# Altium PCB 水杯.PcbDoc
Units mm, origin at the board's own origin, x right, y up, seen from the top; angles counter-clockwise.
Board outline 66.4 x 64.2 mm, 2 copper layers (Top Layer, Bottom Layer), stack 1.671 mm thick; 122 components, 0 nets, 336 pads, 0 vias.
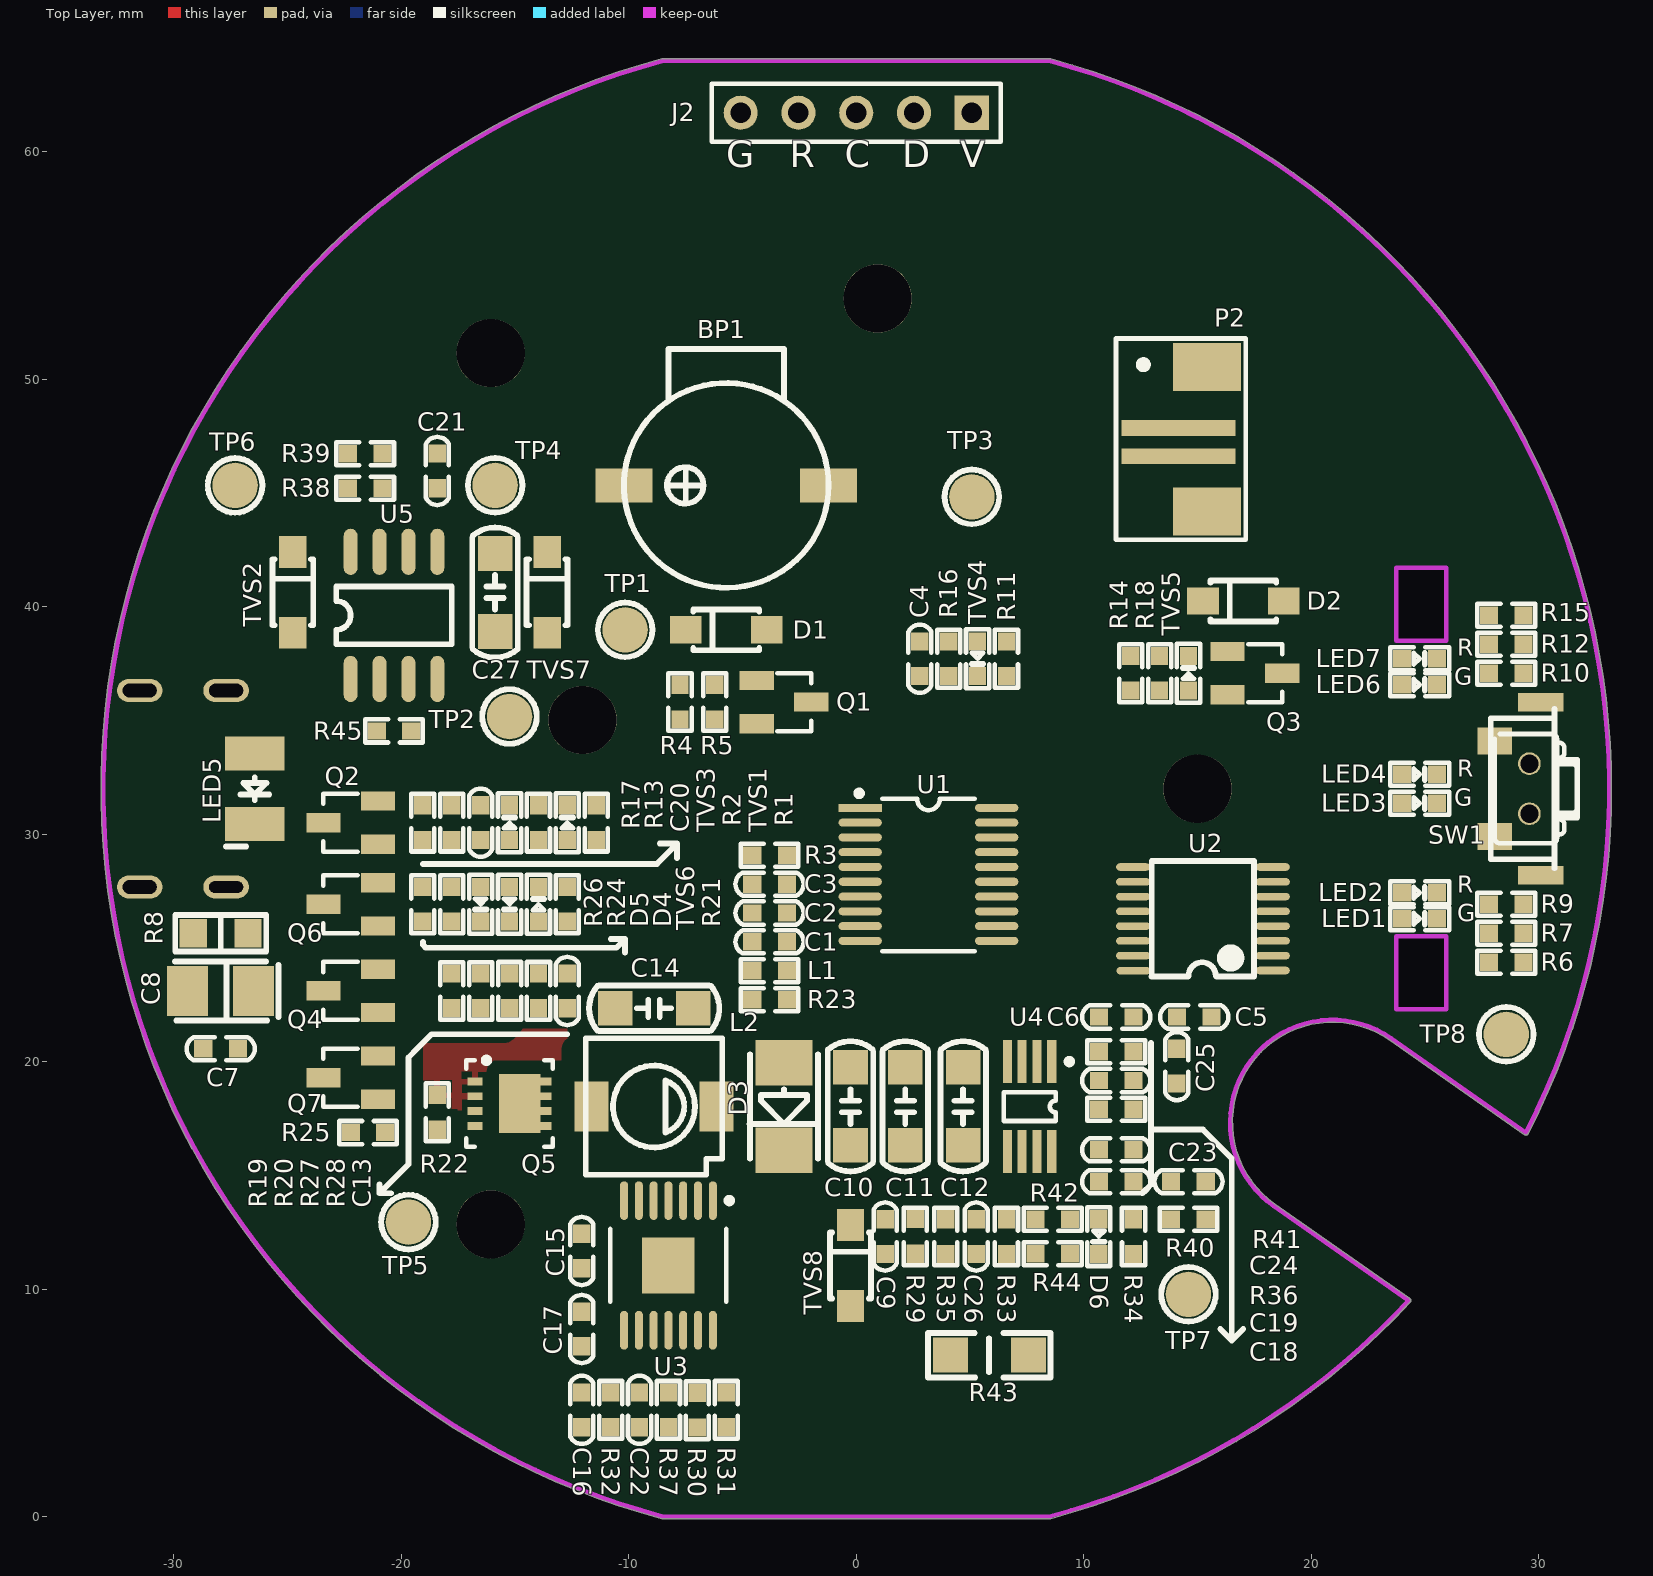
[diagram p0: Top Layer view]
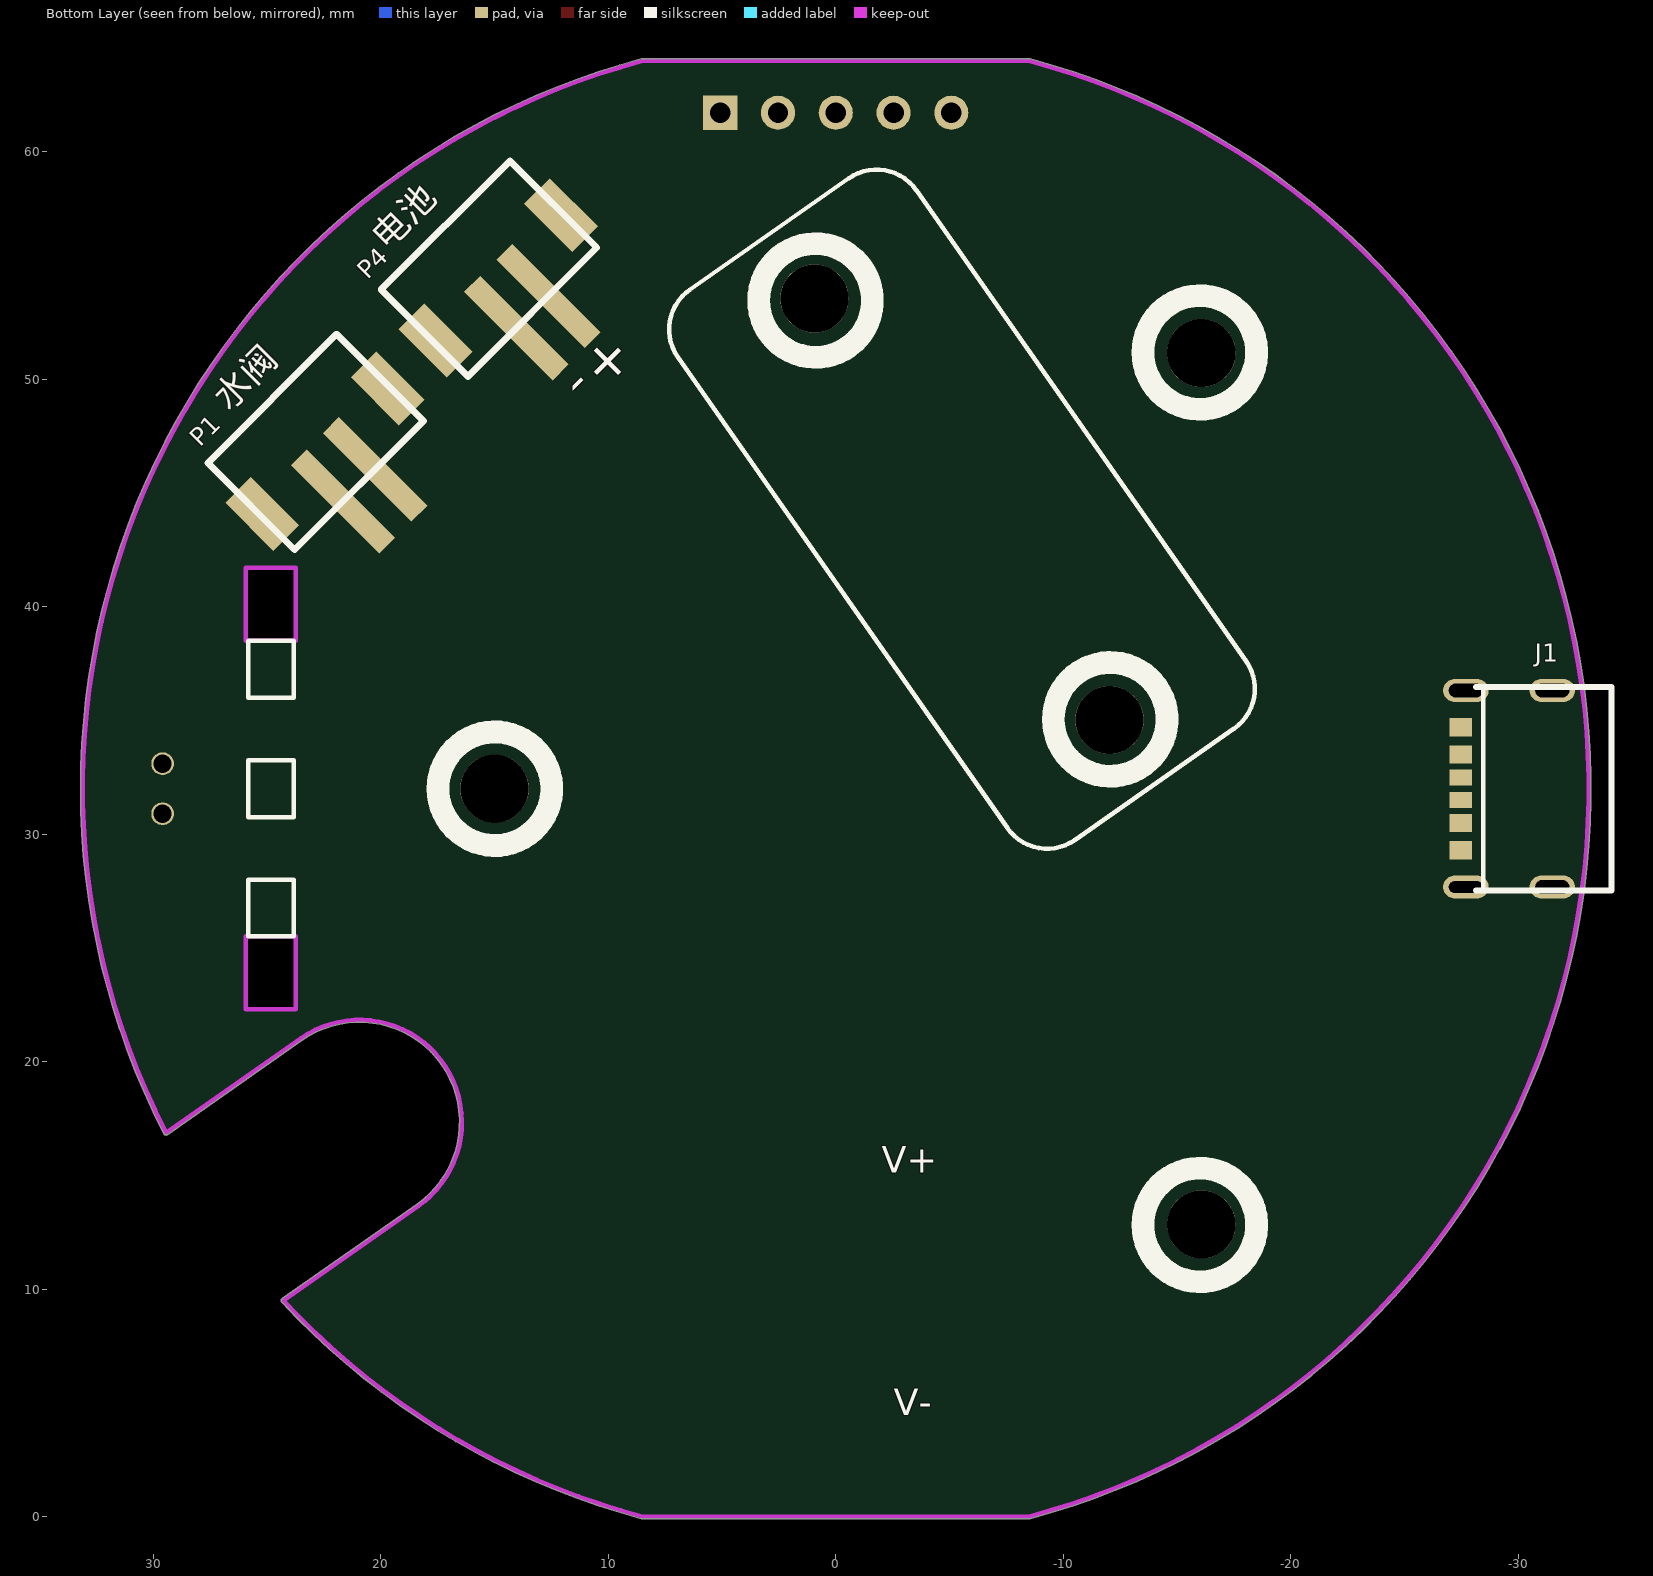
[diagram p1: Bottom Layer view, seen from below]

## Layer stack, top to bottom
Top Solder: solder mask 0.0102, Solder Resist, Dk 3.5
Top Layer: signal copper 0.0356
Dielectric 1: dielectric 1.6, FR-4, Dk 4.8
Bottom Layer: signal copper 0.0356
Bottom Solder: solder mask 0.0102, Solder Resist, Dk 3.5

## Board outline
-8.54,-0.084 ccw(c-8.485,0) -8.485,-0.1 8.485,-0.1 ccw(c8.485,0) 8.543,-0.081 ccw(c-0.003,32) 24.348,9.432 ccw(c24.274,9.5) 24.375,9.5 ccw(c24.274,9.5) 24.339,9.577 ccw(c24.255,9.522) 24.312,9.604 18.41,13.737 cw(c20.934,17.341) 23.457,20.945 23.458,20.945 cw(c23.515,21.027) 23.457,20.945 23.458,20.945 29.383,16.796 ccw(c29.441,16.878) 29.54,16.868 ccw(c29.475,16.944) 29.564,16.898 ccw(c-0.003,32) 33.198,32 ccw(c-0.003,32) 8.533,64.085 ccw(c8.479,64) 8.479,64.1 -8.49,64.1 ccw(c-8.49,64) -8.548,64.082 ccw(c-0.003,32)

## Design rules (kind name [scope] priority, off if disabled: settings)
Clearance Clearance_1 [All vs InPolygon] p1: gap=0.508
Clearance [All] p2: gap=0.2
PolygonConnect PolygonConnect_1 [isvia] p1: connectstyle=Direct reliefconductorwidth=0.254 reliefentries=4 polygonreliefangle="90 Angle" airgapwidth=0.254
PolygonConnect [All] p2: connectstyle=Relief reliefconductorwidth=0.254 reliefentries=4 polygonreliefangle="90 Angle" airgapwidth=0.254
RoutingVias [All] p1: holewidth=0.711 width=1.27 viastyle="Through Hole" minholewidth=0.711 minwidth=1.27 maxholewidth=0.711 maxwidth=1.27
SolderMaskExpansion [All] p1: expansion=0.102
Width [All] p1: maxlimit=1 minlimit=0.254 preferedwidth=0.254
29 further rules are at their usual default settings.

## Classes and differential pairs
component class POWER: C7 C8 C9 C10 C11 C12 C13 C14 C15 C16 C17 C18 C19 C20 C21 C22 C23 C24 C25 C26 C27 D3 D4 D5 D6 L2 P4 Q4 Q5 Q6 Q7 R19 R20 R21 R22 R23 R24 R25 R26 R27 R28 R29 R30 R31 R32 R33 R34 R35 R36 R37 R38 R39 R40 R41 R42 R43 R44 R45 SW1 TP4 TP5 TP6 TP7 TP8 TVS6 TVS7 TVS8 U3 U4 U5
component class MCU: BP1 C1 C2 C3 C4 C5 C6 D1 D2 J1 J2 L1 LED1 LED2 LED3 LED4 LED5 LED6 LED7 P1 P2 Q1 Q2 Q3 R1 R2 R3 R4 R5 R6 R7 R8 R9 R10 R11 R12 R13 R14 R15 R16 R17 R18 TP1 TP2 TP3 TVS1 TVS2 TVS3 TVS4 TVS5 U1 U2

## Components (designator, comment, footprint, x,y, rotation, side; value= is the part's Value field where it differs from the comment)
BP1 "KLJ-9032" SP9025 -5.717,45.335 r180 top
C1 "10uF 10V" SMD-0603C -3.812,25.269 r0 top
C2 "104 50V" SMD-0603C -3.812,26.539 r0 top
C3 "10uF 10V" SMD-0603C -3.812,27.809 r180 top
C4 "104 50V" SMD-0603C 2.792,37.715 r270 top
C5 "10uF 10V" SMD-0603C 14.857,21.967 r180 top
C6 "104 50V" SMD-0603C 11.428,21.967 r0 top
C7 "104 50V" SMD-0603C -27.942,20.57 r0 top
C8 "100uF 10V" SMD-3528-B -27.942,23.11 r180 top
C9 "104 50V" SMD-0603C 1.268,12.315 r90 top
C10 "106 35V X5R" SMD-1206C -0.256,18.03 r270 top
C11 "106 35V X5R" SMD-1206C 2.157,18.03 r270 top
C12 "106 35V X5R" SMD-1206C 4.697,18.03 r270 top
C13 "104 50V" SMD-0603C -12.702,23.11 r270 top
C14 "106 35V X5R" SMD-1206C -8.892,22.348 r180 top
C15 "0.047uF 50V" SMD-0603C -12.067,11.68 r270 top
C16 "104 50V" SMD-0603C -12.068,4.696 r90 top
C17 "100pF 50V" SMD-0603C -12.067,8.251 r90 top
C18 "10uF 10V" SMD-0603C 11.427,14.729 r180 top
C19 "104 50V" SMD-0603C 11.427,16.126 r180 top
C20 "104 50V" SMD-0603C -16.512,30.511 r90 top
C21 "104 50V" SMD-0603C -18.417,45.97 r90 top
C22 "NC" SMD-0603C -9.528,4.696 r270 top
C23 "104 50V" SMD-0603C 14.602,14.729 r180 top
C24 "104 50V" SMD-0603C 11.427,19.174 r180 top
C25 "100pF 50V" SMD-0603C 14.095,19.808 r270 top
C26 "NC" SMD-0603C 5.268,12.315 r270 top
C27 "106 35V X5R" SMD-1206C -15.877,40.636 r90 top
D1 "1N4148" SOD-123 -5.717,38.985 r180 top
D2 "1N4148" SOD-123 17.016,40.255 r180 top
D3 "1N5822 SMA SS34" DO-214-AC -3.177,18.03 r270 top
D4 "1N4148" SOD-523 -15.242,26.92 r270 top
D5 "1N4148" SOD-523 -16.512,26.92 r270 top
D6 "1N4148" SOD-523 10.665,12.316 r270 top
J1 "TYPE-C" USB-TYPE-C-6P -29.602,32 r90 bottom
J2 "OCDD" sip-5 -0.003,61.719 r180 top
L1 "GZ1608D101TF" SMD-0603 -3.812,23.999 r180 top
L2 "SLF6028T-100M1R3-PF" SLF6208T -8.893,18.031 r0 top
LED1 "LED 0603 G" SMD-0603D 24.763,26.285 r0 top
LED2 "LED 0603 R" SMD-0603D 24.763,27.428 r0 top
LED3 "LED 0603 G" SMD-0603D 24.763,31.365 r0 top
LED4 "LED 0603 R" SMD-0603D 24.763,32.635 r0 top
LED5 "蓝光 3528" LED-3528 -26.441,32 r270 top
LED6 "LED 0603 G" SMD-0603D 24.763,36.572 r0 top
LED7 "LED 0603 R" SMD-0603D 24.763,37.715 r0 top
P1 "PH2.0-2P-LI" PH2.0-2P-LI 20.953,45.335 r135 bottom
P2 "1.25mm卧贴" SP2-1.25 13.968,47.24 r270 top
P4 "PH2.0-2P-LI" PH2.0-2P-LI 13.333,52.955 r135 bottom
Q1 "S8050" SOT-23 -3.177,35.81 r270 top
Q2 "S8050" SOT-23 -22.227,30.511 r90 top
Q3 "AO3400" SOT-23 17.524,37.08 r270 top
Q4 "AO3401" SOT-23 -22.225,23.114 r90 top
Q5 "AON7407" DFN3*3-8 -15.242,18.157 r270 top
Q6 "S8050" SOT-23 -22.227,26.92 r90 top
Q7 "S8050" SOT-23 -22.227,19.3 r90 top
R1 "1K" SMD-0603 -11.432,30.511 r270 top
R2 "1K" SMD-0603 -13.972,30.511 r270 top
R3 "1K" SMD-0603 -3.812,29.079 r0 top
R4 "4.7K" SMD-0603 -7.749,35.81 r90 top
R5 "47K" SMD-0603 -6.225,35.81 r270 top
R6 "680R" SMD-0603 28.573,24.38 r0 top
R7 "1K" SMD-0603 28.573,25.65 r0 top
R8 "68R" SMD-0805 -27.942,25.65 r0 top
R9 "680R" SMD-0603 28.573,26.92 r0 top
R10 "1K" SMD-0603 28.573,37.08 r0 top
R11 "10K" SMD-0603 6.602,37.715 r90 top
R12 "680R" SMD-0603 28.573,38.35 r0 top
R13 "1K" SMD-0603 -17.782,30.511 r270 top
R14 "100R" SMD-0603 12.063,37.08 r90 top
R15 "1K" SMD-0603 28.573,39.62 r0 top
R16 "1K" SMD-0603 4.062,37.715 r270 top
R17 "47K" SMD-0603 -19.052,30.511 r90 top
R18 "10K" SMD-0603 13.333,37.08 r90 top
R19 "47K" SMD-0603 -17.782,23.11 r270 top
R20 "1K" SMD-0603 -16.512,23.11 r270 top
R21 "10K" SMD-0603 -12.702,26.92 r270 top
R22 "47K" SMD-0603 -18.417,17.776 r270 top
R23 "1K" SMD-0603 -3.812,22.729 r180 top
R24 "1K" SMD-0603 -17.783,26.921 r270 top
R25 "1K" SMD-0603 -21.465,16.887 r180 top
R26 "47K" SMD-0603 -19.053,26.921 r270 top
R27 "1K" SMD-0603 -15.24,23.114 r270 top
R28 "47K" SMD-0603 -13.97,23.114 r270 top
R29 "180K" SMD-0603 2.591,12.319 r90 top
R30 "78.7K" SMD-0603 -6.985,4.684 r90 top
R31 "0R" SMD-0603 -5.718,4.696 r270 top
R32 "2.55K" SMD-0603 -10.798,4.696 r90 top
R33 "10K" SMD-0603 6.602,12.315 r90 top
R34 "100K" SMD-0603 12.189,12.316 r270 top
R35 "1K" SMD-0603 3.935,12.315 r90 top
R36 "10K" SMD-0603 11.427,17.904 r0 top
R37 "10K" SMD-0603 -8.258,4.696 r90 top
R38 "10K" SMD-0603 -21.592,45.208 r180 top
R39 "10K" SMD-0603 -21.592,46.732 r180 top
R40 "10K" SMD-0603 14.602,13.078 r180 top
R41 "1K" SMD-0603 11.427,20.444 r180 top
R42 "100K" SMD-0603 8.634,13.077 r0 top
R43 "1R" SMD-1206 5.84,7.108 r180 top
R44 "13K" SMD-0603 8.634,11.553 r0 top
R45 "1.6K" SMD-0603 -20.322,34.54 r180 top
SW1 "SW-BP" PB-3*6*3.5侧 29.588,32.001 r90 top
TP1 "testpoint" TP -10.162,38.985 r0 top
TP2 "testpoint" TP -15.242,35.175 r0 top
TP3 "testpoint" TP 5.08,44.831 r0 top
TP4 "testpoint" TP -15.875,45.339 r0 top
TP5 "testpoint" TP -19.687,12.95 r0 top
TP6 "testpoint" TP -27.307,45.335 r0 top
TP7 "testpoint" TP 14.602,9.776 r0 top
TP8 "testpoint" TP 28.573,21.205 r0 top
TVS1 "ESD5Z5.0T1G" SOD-523 -12.702,30.511 r90 top
TVS2 "CESD5V0D1 KE" SOD-123 -24.767,40.636 r90 top
TVS3 "ESD5Z5.0T1G" SOD-523 -15.242,30.511 r90 top
TVS4 "ESD5Z5.0T1G" SOD-523 5.332,37.715 r270 top
TVS5 "ESD5Z5.0T1G" SOD-523 14.603,37.08 r90 top
TVS6 "ESD5Z5.0T1G" SOD-523 -13.972,26.92 r90 top
TVS7 "CESD5V0D1 KE" SOD-123 -13.591,40.636 r90 top
TVS8 "NC" SOD-123 -0.256,11.045 r90 top
U1 "N76E003AT20" TSSOP20 3.173,28.241 r0 top
U2 "74HC595" SSOP-16 15.238,26.285 r90 top
U3 "TPS55340PWPR" TSSOP-14 -8.258,11.046 r270 top
U4 "OPA2376AIDGKR" MSOP-8 7.618,18.03 r270 top
U5 "TP4056" ESOP-8 -20.322,39.62 r90 top

## Footprints (in the part's own frame and the unit in brackets; to place one, negate y for a bottom-side part, rotate by r counter-clockwise, add the part's x,y. Pads: shape width x height; smd on the part's side, far side on the other; paste and mask are expansions set on the pad)
DFN3*3-8 [mm] "QFN, 16-Leads, Body 3.30x3.30mm, Pitch 0.65mm, Thermal Pad 2.45x2.45mm, IPC Medium Density"
  rect 0.35x0.65 smd: 1(0.975,-1.525) 2(-0.975,1.525) 2(-0.325,1.525) 2(0.325,1.525) 2(0.975,1.525) 3(-0.975,-1.525) 3(-0.325,-1.525) 3(0.325,-1.525)
  rect 2.6x1.84 smd: 2(0,0.45)
  silkscreen extent -2.03,-1.9 1.9,1.9, body extent -1.75,-1.75 1.75,1.75, height 0.8
DO-214-AC [mm] "Molded Diode, 2-Leads, Body 4.5x2.6mm, IPC Medium Density"
  rect 2x2.5 smd: 1(-1.915,0) 2(1.915,0)
  silkscreen extent -2.3,-1.52 2.3,1.5, body extent -2.3,-1.35 2.3,1.35, height 2.4
ESOP-8 [mil] "中体积贴片-带散热"
  oval 80x24 smd: 1(-110,75) 2(-110,25) 3(-110,-25) 4(-110,-75) 5(110,-75) 6(110,-25) 7(110,25) 8(110,75)
  silkscreen extent -50,-100 50,100, body extent -119,-99 119,99, height 63
LED-3528 [mm] "贴片二极管"
  rect 1.5x2.6 smd: 1(-1.55,0) 2(1.55,0)
  silkscreen extent -0.51,-1.27 2.54,0.64
MSOP-8 [mm] "TSOP, 8-Leads, Body 3.1x3.1mm (max), Pitch 0.65mm, IPC Medium Density"
  rect 1.9x0.4 smd: 1(-1.975,0.975) 2(-1.975,0.325) 3(-1.975,-0.325) 4(-1.975,-0.975) 5(1.975,-0.975) 6(1.975,-0.325) 7(1.975,0.325) 8(1.975,0.975)
  silkscreen extent -2.1,-1.14 0.64,1.88, body extent -2.45,-1.5 2.45,1.5, height 1.15
PB-3*6*3.5侧 [mm] "3*6*2.5贴片按键"
  rect 0.8x2 smd: 0(-3.8,-0.508) 0(3.8,-0.508)
  round 1 hole 0.8: 0(-1.1,0) 0(1.1,0)
  rect 1.2x1.5 smd: 1(-2.1,1.524) 2(2.1,1.524)
  silkscreen extent -3.5,-2.1 3.5,1.7
PH2.0-2P-LI [mm]
  rect 1.6x3 smd: 0(-3.9,2.123) 0(3.9,2.123)
  rect 1x5.5 smd: 1(-1,0) 2(1,0)
  silkscreen extent -4,0 4,5.4, body extent -4.06,-1.9 3.94,5.5, height 6.5
sip-5 [mm]
  rect 1.5x1.5 hole 0.9: 1(-5.08,0)
  round 1.5 hole 0.9: 2(-2.54,0) 3(0,0) 4(2.54,0) 5(5.08,0)
  silkscreen extent -6.35,-1.27 6.35,1.27
SLF6208T [mm] "Precision Wire Wound Inductor, 2-Leads, Body 5.3x5.3mm, IPC Medium Density"
  rect 1.5x2.2 smd: 1(-2.75,0) 2(2.75,0)
  silkscreen extent -3,-3 3,3, body extent -3,-2.95 3,3.05, height 2.8
SMD-0603 [mil] "W1/32贴片电阻"
  rect 31.5x30 smd: 1(-30,0) 2(30,0)
  silkscreen extent -50,-20 50,20, body extent -31,-16 32,16, height 18
SMD-0603C [mil] "贴片电容"
  rect 31.5x30 smd: 1(-30,0) 2(30,0)
  silkscreen extent -59,-20 59,20, body extent -31,-16 32,16
SMD-0603D [mil] "贴片二极管"
  rect 31.5x30 smd: 1(-30,0) 2(30,0)
  silkscreen extent -51,-20 51,20, body extent -31,-16 32,16, height 26
SMD-0805 [mm] "贴片电阻"
  rect 1.2x1.27 smd: 1(-1.2,0) 2(1.2,0)
  silkscreen extent -2,-0.8 2,0.8, body extent -1,-0.63 1,0.63, height 0.55
SMD-1206 [mil] "贴片电阻"
  rect 60x60 smd: 1(-68,0) 2(67,0)
  silkscreen extent -106,-38 106,39, body extent -63,-31 63,32, height 24
SMD-1206C [mil] "贴片电容"
  rect 60x60 smd: 1(-68,0) 2(67,0)
  silkscreen extent -113,-39 112,39, body extent -63,-31 63,32, height 24
SMD-3528-B [mm] "Molded Capacitor, 2-Leads, Body 3.5x2.2mm, IPC Medium Density"
  rect 1.8x2.2 smd: 1(-1.45,0) 2(1.45,0)
  silkscreen extent -2.54,-1.3 2.01,1.3, body extent -1.85,-1.46 1.85,1.47, height 2.03
SOD-123 [mm]
  rect 1.4x1.2 smd: 1(-1.778,0) 2(1.778,0)
  silkscreen extent -1.45,-0.9 1.45,0.9, body extent -1.85,-0.8 1.85,0.8, height 1.2
SOD-523 [mil] "贴片二极管"
  rect 31.5x30 smd: 1(-30,0) 2(30,0)
  silkscreen extent -51,-20 51,20, body extent -31,-16 32,16, height 26
SOT-23 [mm]
  rect 0.85x1.5 smd: 1(-0.95,-1.2) 2(0.95,-1.2) 3(0,1.2)
  silkscreen extent -1.27,-0.3 1.28,1.2, body extent -1.45,-1.4 1.45,1.4, height 1.2
SP2-1.25 [mm]
  rect 0.7x5 smd: 1(-0.625,0.201) 2(0.625,0.201)
  rect 2.1x3 smd: 6(-3.302,1.45) 7(3.048,1.45)
  silkscreen extent -4.55,-2.55 4.3,3.15
SP9025 [mm] "嗡鸣器"
  rect 2.5x1.5 smd: 1(4.5,0) 2(-4.5,0)
  silkscreen extent -4.5,-6 4.5,4.5
SSOP-16 [mm] "高密度SOP16"
  oval 0.33x1.5 smd: 1(-2.275,-3.069) 2(-1.625,-3.069) 3(-0.975,-3.069) 4(-0.325,-3.069) 5(0.325,-3.069) 6(0.975,-3.069) 7(1.625,-3.069) 8(2.275,-3.069) 9(2.275,3.069) 10(1.625,3.069) 11(0.975,3.069) 12(0.325,3.069) 13(-0.325,3.069) 14(-0.975,3.069) 15(-1.625,3.069) 16(-2.286,3.048)
  silkscreen extent -2.54,-2.25 2.54,2.26
TP [mm] "Test Point"
  round 2 smd: 1(0,0)
  silkscreen extent -1.2,-1.2 1.2,1.2
TSSOP20 [mm] "20-pin, 4.40 mm body, 0.65"
  rect 1.9x0.356 smd: 1(-3,2.921)
  oval 1.9x0.356 smd: 2(-3,2.271) 3(-3,1.621) 4(-3,0.971) 5(-3,0.321) 6(-3,-0.329) 7(-3,-0.979) 8(-3,-1.629) 9(-3,-2.279) 10(-3,-2.929) 11(3,-2.929) 12(3,-2.279) 13(3,-1.629) 14(3,-0.979) 15(3,-0.329) 16(3,0.321) 17(3,0.971) 18(3,1.621) 19(3,2.271) 20(3,2.921)
  silkscreen extent -3.17,-3.38 2.03,3.68, body extent -3.28,-3.3 3.27,3.3, height 1.2
TSSOP-14 [mm] "TSOP, 14-Leads, Body 5.00x4.40mm, Pitch 0.65mm, Thermal Pad 2.31.2x2.46.2mm, IPC Medium Density"
  oval 1.7x0.35 smd: 1(-2.85,1.95) 2(-2.85,1.3) 3(-2.85,0.65) 4(-2.85,0) 5(-2.85,-0.65) 6(-2.85,-1.3) 7(-2.85,-1.95) 8(2.85,-1.95) 9(2.85,-1.3) 10(2.85,-0.65) 11(2.85,0) 12(2.85,0.65) 13(2.85,1.3) 14(2.85,1.95)
  rect 2.46x2.31 smd: 15(0,0)
  silkscreen extent -2.97,-2.55 1.6,2.8, body extent -2.25,-2.55 2.25,2.55, height 1.2
USB-TYPE-C-6P [mm] "USN MINI"
  oval 1x2 hole 0.6 slot 1.5 at 90 deg: 0(-4.32,-1.9) 0(4.32,-1.9) 0(4.32,1.9)
  oval 1x2 hole 0.5 slot 1.5 at 90 deg: 0(-4.32,1.9)
  rect 0.8x1 smd: 1(-2.7,2.126) 2(-1.5,2.126) 5(1.5,2.126) 6(2.7,2.126)
  rect 0.7x1 smd: 3(-0.5,2.126) 4(0.5,2.126)
  silkscreen extent -4.47,-4.5 4.47,1.45, body extent -4.47,-5.21 4.47,2.69, height 3.08

## Part data
BP1: library part SPEAKER, "无源蜂鸣器 3.3V 频率2731"
C1 C2 C3 C4 C5 C6 C7 C9 C13 C14 C15 C16 C17 C18 C19 C20 C21 C23 C24 C27: library part CAP4, "贴片电容 10%"
C8: library part CAP2, "钽电容"
C10 C11 C12: library part CAP4, "贴片电容 20%"
C22 C26: library part C, "贴片电容 5%"
C25: library part C, "贴片电容 10%"
D1 D2 D4 D5 D6: library part DIODE2, "小封装二极管"
D3: library part DIODE2, "肖特基二极管"
J1: library part SIP-6, "USB 3.1 Type-C 2.0短体母座 6P贴片式"
J2: library part SIP-5, "下载口(NC)"
L1: library part CIZHU1, "贴片磁珠100R 100M"
L2: library part Inductor1, "10uH 1A"
LED1 LED3 LED6: library part LED0, "绿色高亮"
LED2 LED4 LED7: library part LED0, "红色高亮"
LED5: library part LED0, "LED 3528 蓝"
P1 P4: library part SIP-2, "间距2.0mm 立贴 2Pin"
P2: library part RES3, "卧贴"
Q1 Q2 Q6 Q7: library part NPN-1, "NPN"
Q3: library part "MOSFET N", "MOSFET N"
Q4: library part "MOSFET P", "MOSFET P"
Q5: library part MOSFET-P-B, "MOSFET-P"
R1 R2 R3 R4 R5 R6 R7 R8 R9 R10 R12 R13 R14 R15 R16 R17 R18 R36: library part RES0, "贴片电阻 5%"
R11 R34 R40: library part RES0, "贴片电阻 1%"
R19 R20 R21 R22 R23 R24 R25 R26 R27 R28 R32: library part R, "贴片电阻 5%"
R29 R30 R31 R33 R35 R37 R38 R39 R41 R42 R44 R45: library part R, "贴片电阻 1%"
R43: library part R, "贴片电阻 0.1%"
SW1: "3*6*3.5侧贴按键(编带)"
TP1 TP2 TP3 TP4 TP5 TP6 TP7 TP8: library part TP-1, "测试点"
TVS1 TVS2 TVS3 TVS4 TVS5 TVS6 TVS7 TVS8: library part TVS-1, "ESD二极管"
U1: "新唐MCU"
U3: library part TPS55340, "DCDC"
U4: library part LM358, "运放"
U5: "拓微"

## Free pads (board coordinates)
  round 3 hole 3 unplated: 0(-16.072,12.849) 0(-16.072,51.151) 0(-12.038,35.024) 0(0.937,53.554) 0(14.998,32)
  rect 2.2x2.2 hole 2.2 square unplated: 0(24.829,23.418) 0(24.829,24.434) 0(24.829,39.674) 0(24.829,40.69)

## Nets (pads, with @x,y where several pads share a name; then routed paths per layer and width w, separated by ;. In a path a pad name is that pad's centre, name@x,y a point inside that pad or via, vN(x,y) a via of type N, cw(c..) or ccw(c..) an arc to the next point about the centre after c; other vN are vias at no path point)
pads on no net: BP1.1 BP1.2 C1.1 C1.2 C2.1 C2.2 C3.1 C3.2 C4.1 C4.2 C5.1 C5.2 C6.1 C6.2 C7.1 C7.2 C8.1 C8.2 C9.1 C9.2 C10.1 C10.2 C11.1 C11.2 C12.1 C12.2 C13.1 C13.2 C14.1 C14.2 C15.1 C15.2 C16.1 C16.2 C17.1 C17.2 C18.1 C18.2 C19.1 C19.2 C20.1 C20.2 C21.1 C21.2 C22.1 C22.2 C23.1 C23.2 C24.1 C24.2 C25.1 C25.2 C26.1 C26.2 C27.1 C27.2 D1.1 D1.2 D2.1 D2.2 D3.1 D3.2 D4.1 D4.2 D5.1 D5.2 D6.1 D6.2 J1.0 J1.1 J1.2 J1.3 J1.4 J1.5 J1.6 J2.1 J2.2 J2.3 J2.4 J2.5 L1.1 L1.2 L2.1 L2.2 LED1.1 LED1.2 LED2.1 LED2.2 LED3.1 LED3.2 LED4.1 LED4.2 LED5.1 LED5.2 LED6.1 LED6.2 LED7.1 LED7.2 P1.0 P1.1 P1.2 P2.1 P2.2 P2.6 P2.7 P4.0 P4.1 P4.2 Q1.1 Q1.2 Q1.3 Q2.1 Q2.2 Q2.3 Q3.1 Q3.2 Q3.3 Q4.1 Q4.2 Q4.3 Q5.1 Q5.2 Q5.3 Q6.1 Q6.2 Q6.3 Q7.1 Q7.2 Q7.3 R1.1 R1.2 R2.1 R2.2 R3.1 R3.2 R4.1 R4.2 R5.1 R5.2 R6.1 R6.2 R7.1 R7.2 R8.1 R8.2 R9.1 R9.2 R10.1 R10.2 R11.1 R11.2 R12.1 R12.2 R13.1 R13.2 R14.1 R14.2 R15.1 R15.2 R16.1 R16.2 R17.1 R17.2 R18.1 R18.2 R19.1 R19.2 R20.1 R20.2 R21.1 R21.2 R22.1 R22.2 R23.1 R23.2 R24.1 R24.2 R25.1 R25.2 R26.1 R26.2 R27.1 R27.2 R28.1 R28.2 R29.1 R29.2 R30.1 R30.2 R31.1 R31.2 R32.1 R32.2 R33.1 R33.2 R34.1 R34.2 R35.1 R35.2 R36.1 R36.2 R37.1 R37.2 R38.1 R38.2 R39.1 R39.2 R40.1 R40.2 R41.1 R41.2 R42.1 R42.2 R43.1 R43.2 R44.1 R44.2 R45.1 R45.2 SW1.0 SW1.1 SW1.2 TP1.1 TP2.1 TP3.1 TP4.1 TP5.1 TP6.1 TP7.1 TP8.1 TVS1.1 TVS1.2 TVS2.1 TVS2.2 TVS3.1 TVS3.2 TVS4.1 TVS4.2 TVS5.1 TVS5.2 TVS6.1 TVS6.2 TVS7.1 TVS7.2 TVS8.1 TVS8.2 U1.1 U1.2 U1.3 U1.4 U1.5 U1.6 U1.7 U1.8 U1.9 U1.10 U1.11 U1.12 U1.13 U1.14 U1.15 U1.16 U1.17 U1.18 U1.19 U1.20 U2.1 U2.2 U2.3 U2.4 U2.5 U2.6 U2.7 U2.8 U2.9 U2.10 U2.11 U2.12 U2.13 U2.14 U2.15 U2.16 U3.1 U3.2 U3.3 U3.4 U3.5 U3.6 U3.7 U3.8 U3.9 U3.10 U3.11 U3.12 U3.13 U3.14 U3.15 U4.1 U4.2 U4.3 U4.4 U4.5 U4.6 U4.7 U4.8 U5.1 U5.2 U5.3 U5.4 U5.5 U5.6 U5.7 U5.8

## Polygon pours and split planes (outlines as drawn)
no net on Top Layer "Top Layer-No Net" (solid, remove dead copper, pour order 2): -12.702,21.586 -12.702,19.173 -16.726,19.173 -16.767,19.132 -16.726,19.173 -15.877,19.173 -15.877,17.395 -19.687,17.395 -19.687,19.046 -19.687,21.586

## Keep-outs
Keep-Out Layer:
  lines w0.2: -8.49,63.994 ccw(c-0.003,32) -8.485,0.005 ; -8.49,64 8.479,64 ; -8.485,0 8.485,0 ; 8.479,63.995 cw(c-0.003,32) 29.475,16.944 ; 8.483,0.006 ccw(c-0.003,32) 24.274,9.5 ; 24.255,9.522 18.353,13.655 cw(c20.934,17.341) 23.515,21.027 29.441,16.878 ; 23.729,22.306 23.729,25.506 25.929,25.506 25.929,22.306 23.729,22.306 ; 23.729,38.506 25.929,38.506 25.929,41.706 23.729,41.706 23.729,38.506

## Silkscreen, mask and mechanical layers (free items; w line width, h text height)
Top Overlay:
  lines w0.2: 28.073,34.193 28.073,29.819 ccw(c28.286,29.819) 28.286,29.606 30.59,29.606 ccw(c30.59,29.819) 30.803,29.819 30.803,34.193 ccw(c30.59,34.193) 30.59,34.406 28.286,34.406 ; 30.803,29.989 30.91,29.989 ccw(c30.91,30.203) 31.123,30.203 31.123,30.444 ccw(c30.91,30.444) 30.91,30.657 30.803,30.657 ; 30.803,30.939 31.486,30.939 ccw(c31.486,31.153) 31.699,31.153 31.699,32.859 ccw(c31.486,32.859) 31.486,33.073 30.803,33.073 ; 30.803,33.355 30.91,33.355 ccw(c30.91,33.568) 31.123,33.568 31.123,33.809 ccw(c30.91,33.809) 30.91,34.023 30.803,34.023
  lines w0.254: -20.957,14.601 -20.957,14.22 ; -20.449,14.22 -20.957,14.22 ; -19.052,25.269 -19.052,25.142 -18.925,25.015 -17.655,25.015 -10.543,25.015 -10.162,25.396 ; -19.052,28.698 -8.765,28.698 -7.876,29.587 ; -18.163,21.205 -12.702,21.205 ; -17.655,21.205 -18.671,21.205 -19.306,20.57 -19.687,20.189 -19.687,18.03 -19.687,15.49 -20.957,14.22 ; -10.797,25.396 -10.162,25.396 ; -10.162,24.799 -10.162,25.396 ; -8.638,29.587 -7.876,29.587 ; -7.876,28.952 -7.876,29.587 ; 12.57,14.221 12.951,14.602 12.951,20.825 ; 12.951,17.015 15.237,17.015 16.507,15.745 16.507,7.744 ; 15.999,8.252 16.507,7.744 ; 17.015,8.252 16.507,7.744
  text "G" at -5.717,58.924 h2
  text "R" at -2.923,58.924 h2
  text "C" at -0.51,58.924 h2
  text "D" at 2.03,58.924 h2
  text "V" at 4.57,58.924 h2
  text "R" at 26.413,37.589 h1.3
  text "G" at 26.287,36.318 h1.3
  text "R" at 26.413,32.255 h1.3
  text "G" at 26.287,30.984 h1.3
  text "R" at 26.414,27.174 h1.3
  text "G" at 26.414,25.904 h1.3
Bottom Overlay:
  circle w1: c14.983,32.001 r2.5
  circle w1: c-12.068,35.049 r2.5
  circle w1: c-16.005,12.824 r2.5
  circle w1: c-16.005,51.178 r2.5
  circle w1: c0.886,53.464 r2.5
  lines w0.2: -28.467,27.531 -28.467,29.111 -28.467,34.891 -28.467,36.471 ; -10.524,29.748 -17.514,34.643 cw(c-16.291,36.39) -18.038,37.614 -3.547,58.309 cw(c-1.799,57.086) -0.576,58.833 6.414,53.939 cw(c5.191,52.191) 6.938,50.968 -7.553,30.272 ; -10.518,29.75 ccw(c-9.294,31.497) -7.547,30.273 ; 23.829,25.506 25.829,25.506 25.829,28.006 23.829,28.006 23.829,25.506 ; 23.829,30.756 25.829,30.756 25.829,33.256 23.829,33.256 23.829,30.756 ; 23.829,36.006 25.829,36.006 25.829,38.506 23.829,38.506 23.829,36.006
  text "电池" at 19.429,55.368 h2 r315
  text "+" at 8.38,50.542 h3 r315
  text "-" at 9.904,49.018 h4 r315
  text "水阀" at 26.414,48.256 h2 r315
  text "V+" at -2.034,14.728 h2
  text "V-" at -2.542,4.06 h2
Top Solder:
  rectangle: -22.227,38.477 -18.417,40.763